# EAGLE board Inverter 3 Phase MC3PHAC (EAGLE 9.5.0)
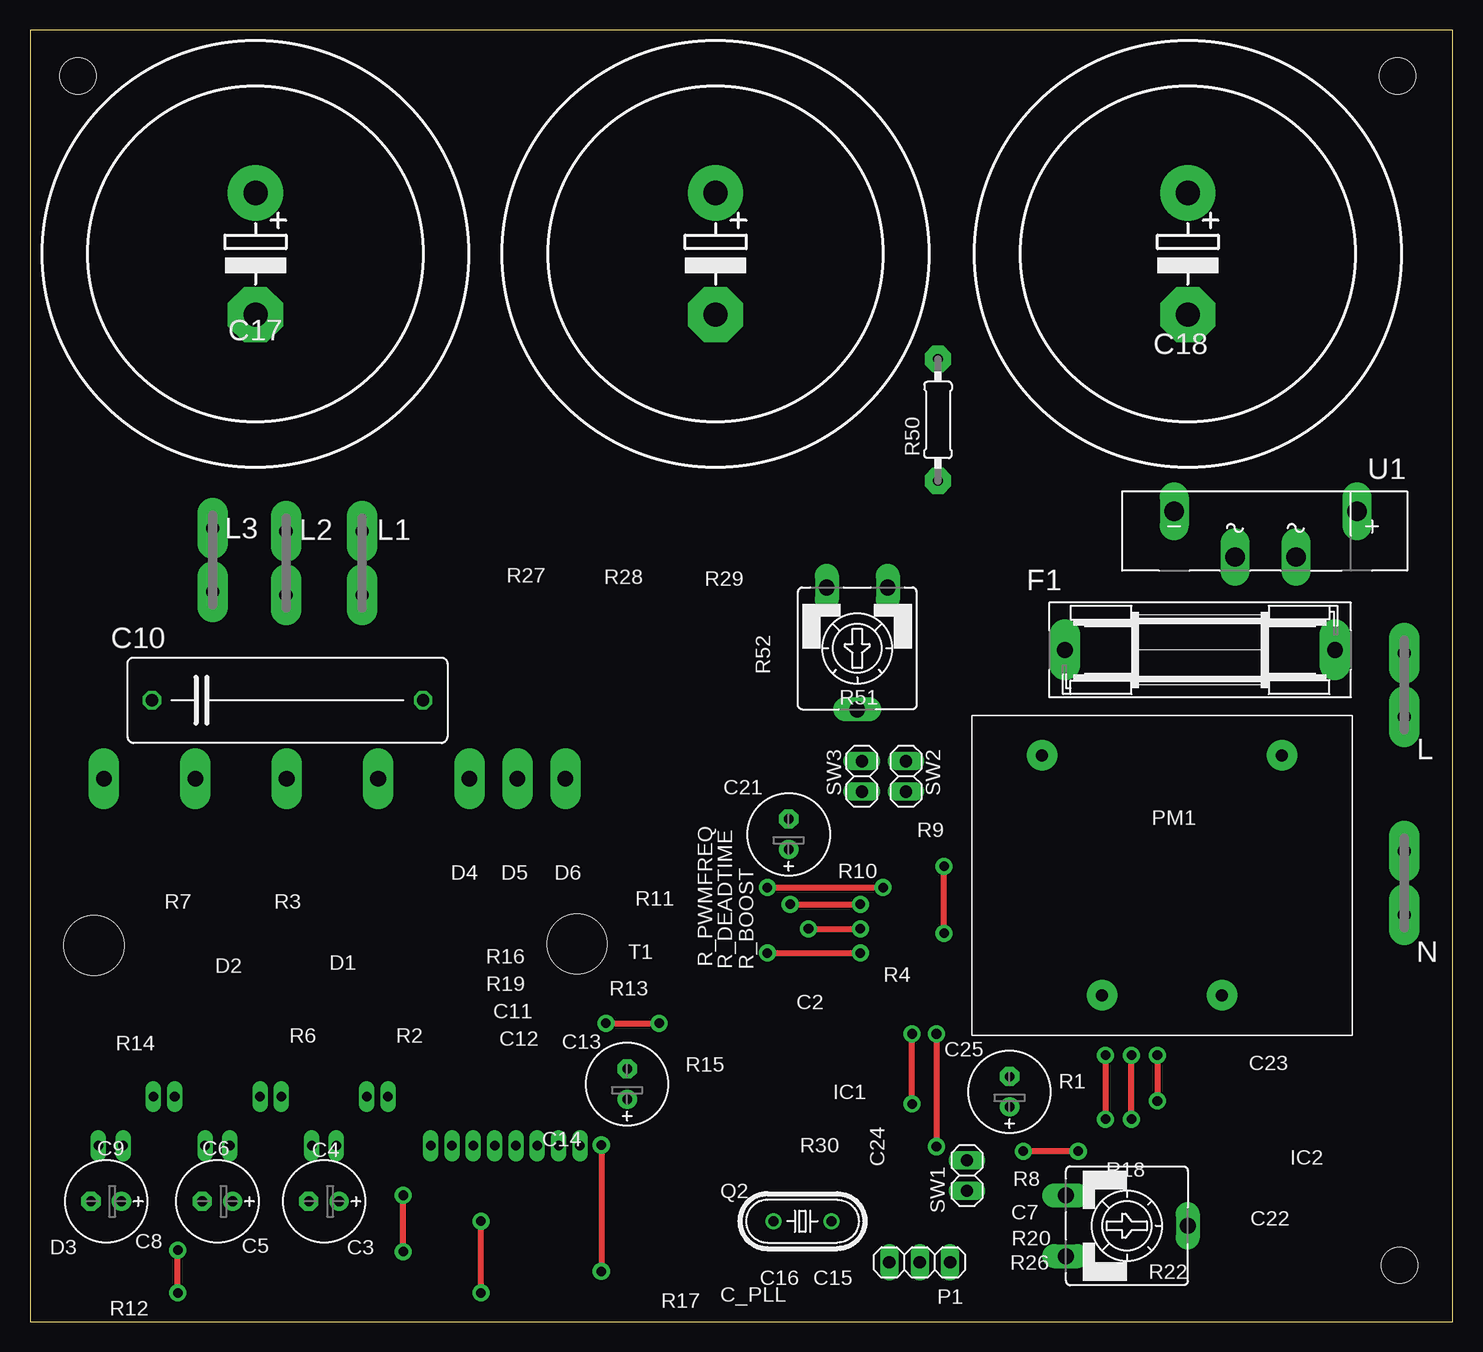
[diagram p0: board, top side]
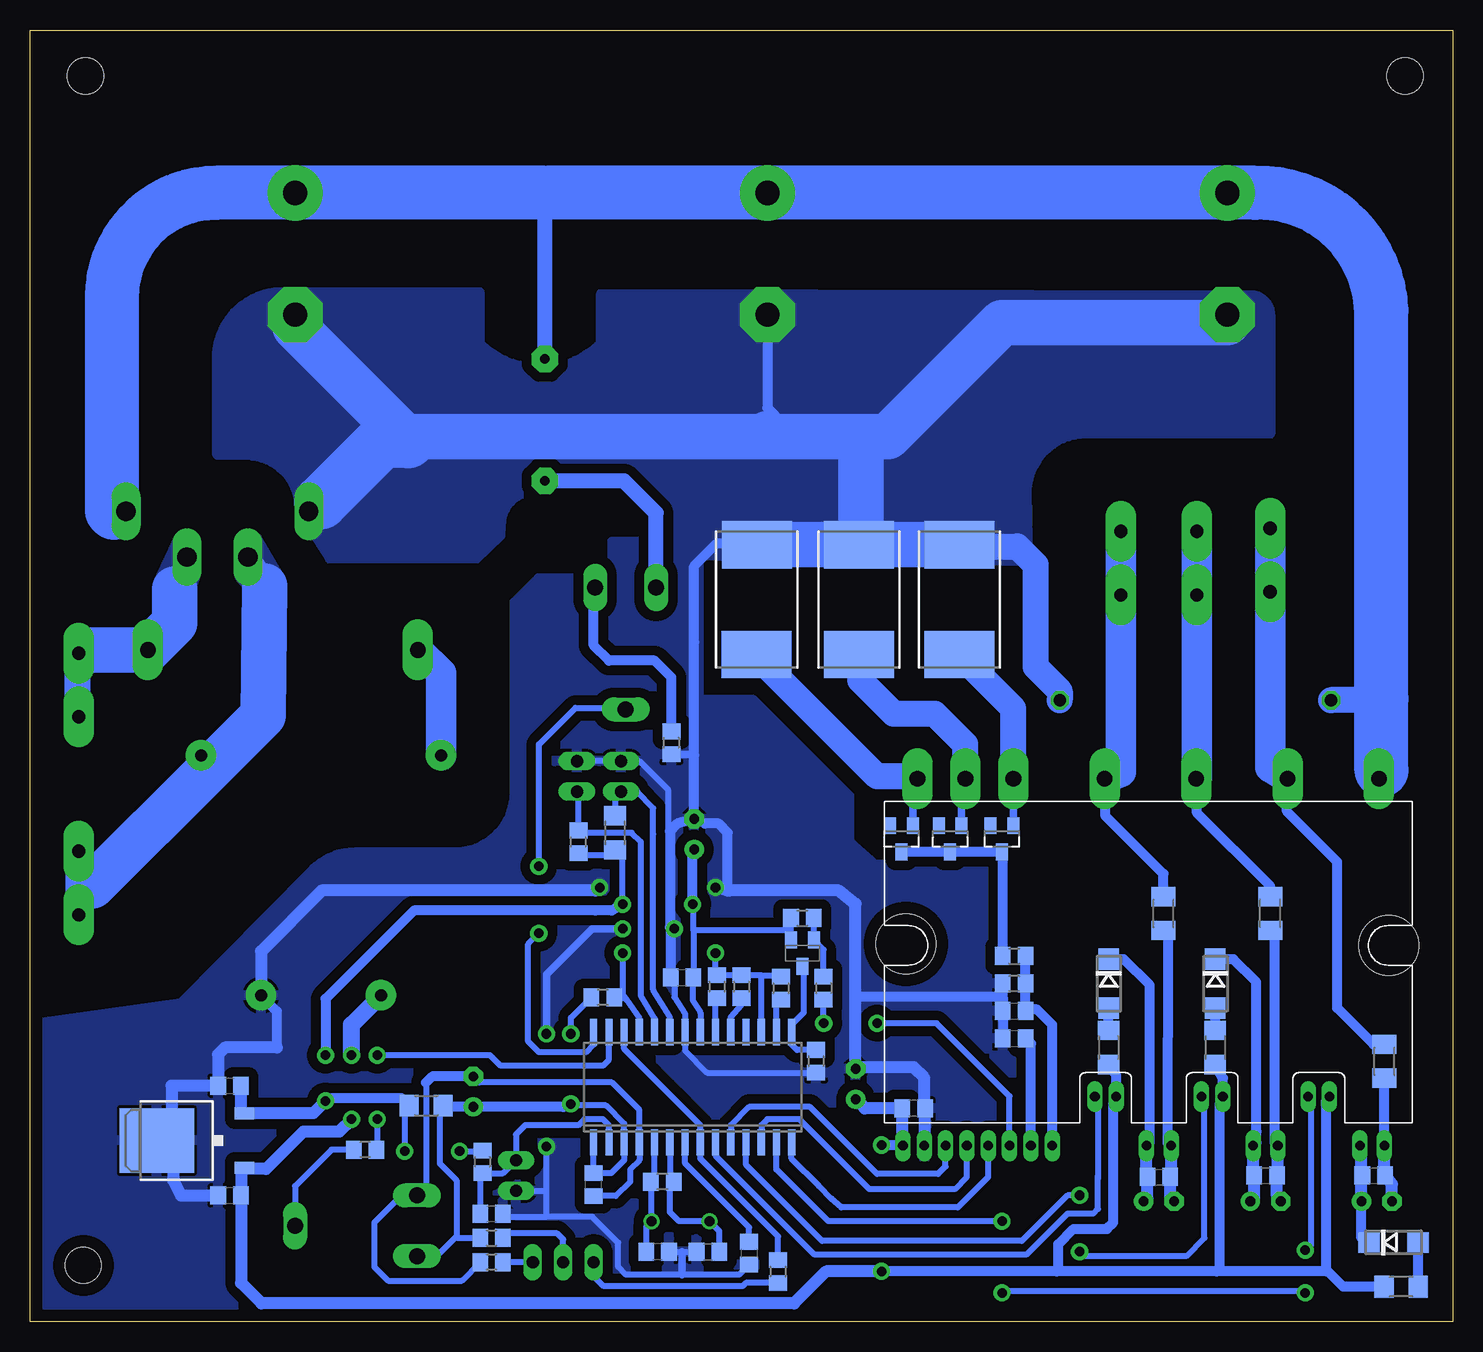
[diagram p1: board, bottom side, seen from below]

Size 118.62 x 107.69 mm. Coordinates in mm from the lower left corner, seen from the top.
Outline: 0,0 118.62,0 118.62,107.69 0,107.69 0,0
Copper layers (1*16): Top 0.035mm / dielectric 1.5mm / Bottom 0.035mm
Design rules "default": minimum track width 10mil, minimum drill 24mil, track to track 8mil, track to pad 8mil, pad to pad 8mil, via to via 8mil, smd to smd 8mil, copper to edge 40mil, drill to drill 8mil, minimum pad ring 10mil, minimum via ring 8mil, stop-mask expansion 4mil, vias tented up to drill 0mil, thermal gap 10mil
Holes 5 mm at 5.33,31.37 45.59,31.5
Holes 3 mm at 114.17,4.7 4,103.86 114,103.86

## Footprints (pad centres in the part's own frame; a part is rotated, then mirrored left to right if it is on the bottom)
C0805 = smd 1.3 x 1.5: 1 -0.95,0; 2 0.95,0
E2,5-7 = drill 0.813 pad 1.6: + -1.27,0 | drill 0.813 pad 1.6 octagon: - 1.27,0
C225-074X268 = drill 1.016 octagon: 1 -11.303,0; 2 11.303,0
EB35D = drill 2.007 pad 4.597: + -5.08,0 | drill 2.007 pad 4.597 octagon: - 5.08,0
DO214AC = smd 1.8 x 1.7: A 2.05,0; C -2.05,0
SOT23 = smd 1 x 1.4: 1 -0.95,-1.1; 2 0.95,-1.1; 3 0,1.1
SH22,5 = drill 1.321 pad 2.54 long: 1 -11.252,0; 2 11.252,0
SO28W = smd 0.6 x 2.2: 1 -8.255,-4.6; 2 -6.985,-4.6; 3 -5.715,-4.6; 4 -4.445,-4.6; 5 -3.175,-4.6; 6 -1.905,-4.6; 7 -0.635,-4.6; 8 0.635,-4.6; 9 1.905,-4.6; 10 3.175,-4.6; 11 4.445,-4.6; 12 5.715,-4.6; 13 6.985,-4.6; 14 8.255,-4.6; 15 8.255,4.6; 16 6.985,4.6; 17 5.715,4.6; 18 4.445,4.6; 19 3.175,4.6; 20 1.905,4.6; 21 0.635,4.6; 22 -0.635,4.6; 23 -1.905,4.6; 24 -3.175,4.6; 25 -4.445,4.6; 26 -5.715,4.6; 27 -6.985,4.6; 28 -8.255,4.6
TO252 = smd 1 x 1.6: 1 -2.28,-4.8; 2 2.28,-4.8 | smd 5.4 x 6.2: 3 0,2.5
F061.060 = drill 1.1 pad 2.54 long: A1 -2.65,0; A2 2.65,0
1X03 = drill 1.016 long: 1 -2.54,0; 2 0,0; 3 2.54,0
MYRRA = drill 1 pad 2.54: 1 -10,10; 5 -10,-10; 7 10,-5; 9 10,5
HC49U-V = drill 0.813: 1 -2.413,0; 2 2.413,0
R1206 = smd 1.6 x 1.803: 1 -1.422,0; 2 1.422,0
M1206 = smd 1.6 x 2: 1 -1.4,0; 2 1.4,0
R0805 = smd 1.3 x 1.5: 1 -0.95,0; 2 0.95,0
CA9V = drill 1.321 long: A -2.54,-5.08; E 2.54,-5.08; S 0,5.08
WSC4527 = smd 3.94 x 5.84: 1 -4.575,0.025; 2 4.575,0
0207/10 = drill 0.813 pad 2.184 octagon: 1 -5.08,0; 2 5.08,0
SPM27-BA = drill 0.8 pad 1.016 long: 1 20.447,15.3; 2 18.669,15.3; 3 16.891,15.3; 4 15.113,15.3; 5 13.335,15.3; 6 11.557,15.3; 7 9.779,15.3; 8 8.001,15.3; 9 4.445,11.2; 10 2.667,11.2; 11 0.136,15.3; 12 -1.914,15.3; 13 -4.445,11.2; 14 -6.223,11.2; 15 -8.754,15.3; 16 -10.804,15.3; 17 -13.335,11.2; 18 -15.113,11.2; 19 -17.644,15.3; 20 -19.694,15.3 | drill 1.3 pad 2.54 long: 21 19.24,-15.3; 22 15.24,-15.3; 23 11.24,-15.3; 24 3.62,-15.3; 25 -4,-15.3; 26 -11.62,-15.3; 27 -19.24,-15.3
1X02 = drill 1.016 long: 1 -1.27,0; 2 1.27,0
SOT23-BEC = smd 1 x 1.4: B -0.95,-1.1; C 0,1.1; E 0.95,-1.1
KBU = drill 1.6 long: + -7.62,-1.27; - 7.62,-1.27; AC1 -2.54,2.54; AC2 2.54,2.54

## Placement (x,y rotation side)
C2  100n  [C0805]  64.26,28.7 0 bottom
C3  100u  [E2,5-7]  24.51,10.03 180 top
C4  100n  [C0805]  24.51,12.06 0 bottom
C5  100u  [E2,5-7]  15.62,10.03 180 top
C6  100n  [C0805]  15.62,12.19 0 bottom
C7  100n  [C0805]  80.14,9.02 0 bottom
C8  100u  [E2,5-7]  6.35,10.03 180 top
C9  100n  [C0805]  6.6,12.19 0 bottom
C10  0.1u  [C225-074X268]  21.46,51.82 0 top
C11  1n  [C0805]  36.58,25.91 0 bottom
C12  100n  [C0805]  36.58,23.62 0 bottom
C13  100u  [E2,5-7]  49.78,19.81 90 top
C14  100n  [C0805]  44.96,17.78 180 bottom
C15  22p  [C0805]  66.29,5.84 180 bottom
C16  22p  [C0805]  62.1,5.84 0 bottom
C17  470u  [EB35D]  18.8,89.03 270 top
C18  470u  [EB35D]  96.52,89.03 270 top
C19  470u  [EB35D]  57.15,89.03 270 top
C21  10u  [E2,5-7]  63.25,40.64 90 top
C22  100n  [C0805]  101.98,10.54 0 bottom
C23  100n  [C0805]  101.98,19.68 0 bottom
C24  100n  [C0805]  71.63,11.43 90 bottom
C25  1u  [E2,5-7]  81.66,19.18 90 top
C_PLL  100n  [C0805]  58.67,5.71 270 bottom
D1  ER1J  [DO214AC]  28.7,28.19 270 bottom
D2  ER1J  [DO214AC]  19.81,28.19 270 bottom
D3  ER1J  [DO214AC]  4.95,6.6 0 bottom
D4  BAR43  [SOT23]  37.59,40.26 180 bottom
D5  BAR43  [SOT23]  41.91,40.26 180 bottom
D6  BAR43  [SOT23]  45.97,40.26 180 bottom
F1  T1A  [SH22,5]  97.54,56.01 180 top
IC1  MC3PHAC  [SO28W]  63.37,19.56 0 bottom
IC2  7805DT  [TO252]  105.54,15.11 90 bottom
L  PIN2F061.060  [F061.060]  114.55,53.09 90 top
L1  PIN2F061.060  [F061.060]  27.69,63.25 270 top
L2  PIN2F061.060  [F061.060]  21.34,63.25 270 top
L3  PIN2F061.060  [F061.060]  15.24,63.5 270 top
N  PIN2F061.060  [F061.060]  114.55,36.58 90 top
P1  5k  [1X03]  74.17,4.95 180 top
PM1  MYRRA 47155  [MYRRA]  94.36,37.21 270 top
Q2  4.0MHz  [HC49U-V]  64.39,8.38 0 top
R1  2R  [R1206]  85.6,18.03 180 bottom
R2  20R  [R1206]  28.7,22.86 90 bottom
R3  5R6  [M1206]  24.13,34.04 270 bottom
R4  6.8k  [R0805]  70.87,27.05 180 bottom
R6  20R  [R1206]  19.81,22.86 90 bottom
R7  5R6  [M1206]  15.24,34.04 270 bottom
R8  10k  [R0805]  80.9,13.34 270 bottom
R9  10k  [R0805]  72.9,40.01 90 bottom
R10  10k  [R1206]  69.85,40.77 90 bottom
R11  6k8  [R0805]  54.23,33.66 0 bottom
R12  20R  [R1206]  4.32,2.92 0 bottom
R13  22k  [R0805]  52.45,27.81 270 bottom
R14  5R6  [M1206]  5.71,21.72 270 bottom
R15  10k  [R0805]  53.09,21.72 270 bottom
R16  1k  [R0805]  36.58,30.48 0 bottom
R17  4.7k  [R0805]  56.26,4.19 270 bottom
R18  4.7k  [R0805]  90.68,14.35 180 bottom
R19  47k  [R0805]  36.58,28.19 180 bottom
R20  2k2  [R0805]  80.14,6.99 0 bottom
R22  4k7  [CA9V]  91.44,8 270 top
R26  150R  [R0805]  80.14,4.95 180 bottom
R27  0R082 5W  [WSC4527]  41.15,60.2 270 bottom
R28  0R082 5W  [WSC4527]  49.53,60.2 270 bottom
R29  0R082 5W  [WSC4527]  58.04,60.2 270 bottom
R30  10M  [R0805]  65.91,11.68 180 bottom
R50  1M  [0207/10]  75.69,75.18 90 top
R51  4k7  [CA9V]  68.96,56.13 180 top
R52  10k  [R0805]  65.15,48.26 270 bottom
R_BOOST  2k2  [R0805]  61.34,27.94 270 bottom
R_DEADTIME  1k8  [R0805]  59.31,27.94 270 bottom
R_PWMFREQ  3k9  [R0805]  56.01,27.81 270 bottom
SPM1  FSBS10CH60  [SPM27-BA]  25.4,29.97 180 bottom
SW1  RESET  [1X02]  78.11,12.19 90 top
SW2  START  [1X02]  73.03,45.47 270 top
SW3  FOR/REW  [1X02]  69.34,45.47 270 top
T1  BC858  [SOT23-BEC]  54.23,30.73 180 bottom
U1  KBU8G  [KBU]  103,66.29 180 top

## Library data of the parts
C2-C19 C21-C25 C_PLL R1-R4 R6-R20 R26-R30 R50 R52 R_BOOST R_DEADTIME R_PWMFREQ = rcl
D1-D6 = diode
F1 = fuse
IC1 P1 PM1 SPM1 SW1-SW3 U1 = Menic
IC2 = linear
L L1-L3 N = con-faston
Q2 = crystal
R22 R51 = pot
T1 = transistor

## Nets
+5V: C2.2 C21.+ C23.2 IC1.21 IC2.2 R1.2 R8.1 R9.1 R10.1 R11.1 T1.E
+15V: C13.+ C14.2 C22.2 IC2.1 PM1.7 R2.1 R6.1 R12.1 SPM1.1 SPM1.10 SPM1.14 SPM1.18
DC_BUS: C10.1 C17.+ C18.+ C19.+ R50.2 SPM1.27 U1.+
GND: C2.1 C7.2 C10.2 C11.1 C12.1 C13.- C14.1 C15.1 C16.1 C17.- C18.- C19.- C21.- C22.1 C23.1 C_PLL.2 IC1.22 IC2.3 PM1.9 R15.2 R19.2 R27.1 R28.1 R29.1 R52.2 SPM1.2 SW1.1 SW2.1 SW3.1 U1.-
GND1: C24.1 C25.- IC1.4 R22.A R26.2
N$1: C_PLL.1 IC1.7
N$2: R18.2 R22.S
N$3: IC1.16 R_PWMFREQ.2
N$4: IC1.19 R_DEADTIME.2
N$5: IC1.20 R_BOOST.2
N$6: IC1.17 IC1.25 R4.1 R_BOOST.1 R_DEADTIME.1 R_PWMFREQ.1
N$7: IC1.8 IC1.26 R17.1
N$8: P1.3 R17.2
N$9: C15.2 IC1.5 Q2.2 R30.2
N$10: P1.2 R20.2
N$12: IC1.27 R18.1
N$13: IC1.24 R9.2 SW2.2
N$14: IC1.23 R10.2 SW3.2
N$15: C16.2 IC1.6 Q2.1 R30.1
N$16: C7.1 IC1.2 R8.2 SW1.2
N$17: N.A1 PM1.1 U1.AC2
N$19: C5.- C6.2 R7.2 SPM1.16
N$20: F1.2 PM1.5
N$25: F1.1 L.A1 U1.AC1
N$27: R51.A R52.1
N$46: C3.+ C4.1 D1.C SPM1.11
N$47: C3.- C4.2 R3.2 SPM1.12
N$48: D1.A R2.2
N$50: C11.2 R16.2 R19.1 SPM1.8
N$51: IC1.15 R15.1 T1.C
N$52: C12.2 SPM1.7
N$53: C5.+ C6.1 D2.C SPM1.15
N$55: D2.A R6.2
N$56: C8.+ C9.1 D3.C SPM1.19
N$57: D3.A R12.2
N$59: C8.- C9.2 R14.2 SPM1.20
N$63: D4.1 R27.2 SPM1.23
N$64: D5.1 R28.2 SPM1.22
N$65: D6.1 R29.2 SPM1.21
N$69: D4.3 D5.3 D6.3 R16.1
N$72: R11.2 R13.1 T1.B
N$77: P1.1 R26.1
N$79: IC1.28 R51.S
PWM-U-BOT: IC1.10 SPM1.3
PWM-U-TOP: IC1.9 SPM1.9
PWM-V-BOT: IC1.12 SPM1.4
PWM-V-TOP: IC1.11 SPM1.13
PWM-W-BOT: IC1.14 SPM1.5
PWM-W-TOP: IC1.13 SPM1.17
R_BRAKE: IC1.18
S$1: R50.1 R51.E
U: L1.A1 R3.1 SPM1.24
V: L2.A1 R7.1 SPM1.25
V_FO: R13.2 SPM1.6
VDD: C24.2 C25.+ IC1.1 IC1.3 R1.1 R4.2 R20.1 R22.E
W: L3.A1 R14.1 SPM1.26

## Tracks (layer width: path | path; a pad name or v marks a point on that pad's centre or on a via)
+5V  (via drill 0.8 pad 1.42)
  Top 0.5: v87.38,14.22 v82.8,14.22 | v63.37,34.8 v69.22,34.8 | v93.98,22.23 v93.98,18.41
  Bottom 0.5: T1.E 55.18,33.02 | 55.18,33.02 R11.1 | R9.1 72.7,38.86 70.33,38.86 R10.1 69.22,38.71 v69.22,34.8 | IC1.21 62.74,25.78 63.37,26.8 63.37,28.64 C2.2 63.31,32.64 | 63.31,32.64 63.31,34.23 v63.37,34.8 | 89.53,18.66 89.66,18.54 | 55.18,33.02 55.24,32.96 55.56,32.64 63.31,32.64 | 81.09,14.1 R8.1 80.96,14.22 v82.8,14.22 | R1.2 87.12,17.93 87.38,17.93 v87.38,14.22
  Bottom 0.813: R1.2 87.65,18.66 87.88,18.66 89.53,18.66 90.19,18.66 93.73,18.66 v93.98,18.41 | v69.22,34.8 70.1,34.29 71.5,34.29 86.61,34.29 93.98,26.92 v93.98,22.23 | v63.37,34.8 63.37,38.86 C21.+
  Bottom 1.016: v93.98,18.41 95,17.39 95.25,17.39 IC2.2 101.03,17.69 C23.2
+15V  (via drill 0.8 pad 1.42)
  Top 0.5: v47.62,14.73 v47.62,4.19 | v91.82,16.89 v91.82,22.23
  Bottom 0.813: SPM1.14 19.18,20.3 R6.1 | R2.1 28.07,20.55 SPM1.10 28.07,18.41 28.32,18.16 28.32,8.26 28.83,7.75 31.62,7.75 32.89,6.48 32.89,4.32 33.02,4.19 | 10.54,4.19 19.68,4.19 | SPM1.14 19.3,18.77 | 19.68,4.19 33.02,4.19 | v47.62,14.73 45.91,14.73 SPM1.1 | R12.1 9.14,2.92 10.41,4.19 10.54,4.19 | 10.54,4.19 10.54,18.52 SPM1.18 | SPM1.14 19.18,18.41 19.43,18.16 19.43,4.45 19.68,4.19 | 33.02,4.19 v47.62,4.19
  Bottom 1.016: C13.+ 49.02,17.78 C14.2 45.91,14.73 SPM1.1 | v47.62,4.19 52.26,4.19 54.93,1.52 99.31,1.52 101.03,3.24 C22.2 101.03,12.54 IC2.1 100.65,12.75 98.93,12.75 95.81,15.88 92.84,15.88 v91.82,16.89
  Bottom 1.422: v91.82,22.23 91.82,24.75 PM1.7
DC_BUS
  Bottom 0.813: 76.07,93.6 76.07,93.73 75.69,94.11
  Bottom 1.016: 75.56,94.11 76.07,93.6
  Bottom 1.27: R50.2 75.69,93.98 75.56,94.11
  Bottom 2.184: 5.97,45.97 5.97,45.46 SPM1.27 | C10.1 6.1,51.82 5.97,51.94 | 111.63,67.44 110.74,67.44 U1.+
  Bottom 3.81: 75.56,94.11 75.69,94.11
  Bottom 4.5: 75.56,94.11 C19.+ C17.+ 16.51,94.11 arc90 5.97,84.33 5.97,51.94 5.97,45.97 | 75.69,94.11 C18.+ 103.12,94.11 arc-90 111.79,85.44 111.79,67.59 111.63,67.44
GND  (via drill 0.8 pad 1.42)
  Top 0.5: v64.9,32.77 v69.22,32.77 | v75.56,24 v75.56,14.61 | v61.47,36.2 v71.12,36.2
  Bottom 0.5: C16.1 64.26,5.84 C15.1 65.72,5.46 | 58.74,4.7 C_PLL.2 59.5,3.94 | C2.1 64.9,28.64 64.9,27.05 64.01,25.65 IC1.22 64.01,22.61 62.17,20.77 R15.2 | SW2.1 SW3.1 67.82,46.74 65.41,44.32 65.41,40.89 65.28,40.89 | 63.25,56.64 63.37,56.77
  Bottom 0.508: 59.5,3.94 64.26,3.94 68.96,3.94 69.6,4.57 69.6,6.6 71.75,8.76 75.56,8.76 | 75.56,8.76 75.56,10.92 | 75.56,10.92 v75.56,14.61 | C7.2 78.93,8.76 75.56,8.76 | SW1.1 75.56,10.92
  Bottom 0.61: 65.21,32.63 65.02,32.63 v64.9,32.77 | v69.22,32.77 71.75,32.77 75.56,28.96 v75.56,24 | 64.26,5.84 64.26,3.94 | R52.2 63.31,47.31 63.25,47.24
  Bottom 0.813: C14.1 44.07,18.03 | 65.21,32.63 C2.1 | 60.45,36.07 60.45,35.94 | 60.33,35.94 60.45,36.07 | C21.- 62.36,41.53 61.21,41.53 60.45,40.77 60.45,36.07 | C21.- 64.64,41.53 65.28,40.89 65.28,32.89 v64.9,32.77 | C21.- 63.25,47.24 63.25,56.64 63.25,62.99 61.34,64.9 58.14,64.9 R29.1 | 98.04,22.86 98.04,25.89 PM1.9 | 49.78,27.09 49.44,27.14 37.61,27.14 37.53,27.05 | 37.53,27.05 C11.1 C12.1 | 37.53,27.05 R19.2 | C19.- 57.15,76.2 55.88,74.93 57.02,73.79 57.4,73.79
  Bottom 1.016: 60.45,35.94 v61.47,36.2 | v71.12,36.2 71.5,35.94 94.31,35.94 99.36,30.89 PM1.9 100.17,27.21 | 106.81,16.34 106.81,19.68 C23.1 102.93,22.29 102.36,22.86 98.04,22.86 | 106.81,16.34 106.79,16.36 106.55,16.13 | 106.81,16.34 IC2.3 106.68,13.76 106.68,11.81 106.05,10.54 C22.1 | 60.33,35.94 51.18,35.94 49.78,34.85 49.78,27.09 C13.- 49.66,21.21 44.96,21.21 44.07,20.32 44.07,17.84 C14.1 44.01,14.73 SPM1.2
  Bottom 2.184: C10.2 32.77,52.58 34.8,54.61 34.8,63.12 36.32,64.64 40.99,64.64 R27.1 | 94.36,68.33 94.61,68.33 U1.-
  Bottom 3.81: C17.- 18.8,83.31 37.59,83.31 47.12,73.79 49.15,73.79 | 49.15,73.79 57.4,73.79 | 57.4,73.79 57.15,74.04 | 49.36,64.77 R28.1 R29.1 | 49.36,64.77 R27.1 | 49.36,64.77 49.36,73.58 49.15,73.79 | 57.4,73.79 86.87,73.79 87.12,73.53 | C18.- 96.52,82.93 87.12,73.53 | 87.12,73.53 87.25,73.53
  Bottom 4.5: 87.25,73.53 87.12,73.41 89.28,73.41 94.36,68.33
  pour Bottom (isolate 0.813, no thermals): 15.24,74.04 30.6,74.04 arc-90 35.56,69.04 35.43,63.37 70.74,64.01 70.74,66.17 arc-90 73.28,69.22 76.58,69.22 arc-90 79.38,66.42 79.42,65.51 81.42,63.6 93.62,63.62 96.1,67.55 arc-91 100.51,72.23 103,72.26 103,80.77 arc90 97.16,85.85 81.15,85.85 81.15,81.58 arc-90 70.99,81.58 70.99,85.72 16.89,85.6 arc90 15.24,83.95
  pour Bottom (isolate 0.813): 48.13,38.1 50.29,40.01 50.29,43.81 58.29,51.82 62.87,51.82 62.87,64.9 70.1,65.02 70.1,61.98 76.23,61.98 78.23,59.98 78.23,44.12 arc90 83.23,39.12 91.53,39.12 arc-45 95.06,37.65 106.05,26.54 117.98,24.89 118.11,0.51 33.14,0.63 33.53,38.1
GND1
  Bottom 0.5: IC1.4 67.82,17.65 70.1,19.94 81.15,19.94 C25.- | 85.6,19.94 85.6,10.54 R22.A 87.63,10.54 89.92,8.26 89.92,4.57 88.77,3.43 82.61,3.43 R26.2
  Bottom 0.508: IC1.4 67.82,13.46 68.58,12.7 68.58,11.68 69.78,10.48 C24.1
  Bottom 0.813: 85.6,19.94 85.09,20.45 C25.-
N$1
  Bottom 0.5: IC1.7 64.01,13.21 58.67,7.87 C_PLL.1
N$2
  Bottom 0.5: R18.2 93.47,14.35 96.52,11.3 R22.S
N$3
  Bottom 0.5: IC1.16 56.39,26.48 R_PWMFREQ.2
N$4
  Bottom 0.5: IC1.19 60.2,25.4 59.31,26.42 R_DEADTIME.2
N$5
  Bottom 0.5: IC1.20 61.47,26.86 R_BOOST.2
N$6  (via drill 0.8 pad 1.42)
  Top 0.5: v61.47,30.73 v69.22,30.73
  Bottom 0.5: IC1.17 57.66,28.89 | 57.66,28.89 R_DEADTIME.1 R_BOOST.1 61.47,29.02 v61.47,30.73 | R_PWMFREQ.1 56.01,28.89 57.66,28.89 | v69.22,30.73 69.22,29.52 69.22,27.3 68.88,26.81 | IC1.25 67.82,25.27 68.88,26.81 | R4.1 68.99,26.92 68.88,26.81
N$7
  Bottom 0.5: IC1.26 69.09,22.73 62.74,16.38 IC1.8 62.74,13.59 56.26,7.11 R17.1
N$8
  Bottom 0.5: R17.2 56.67,2.92 | 71.63,3.81 P1.3
  Bottom 0.508: R17.2 58.94,3.24 59.21,2.97 70.79,2.97 71.63,3.81
N$9
  Bottom 0.5: C15.2 67.24,7.94 Q2.2
  Bottom 0.508: IC1.5 66.55,12 R30.2 66.8,11.62 Q2.2
N$10
  Bottom 0.5: P1.2 74.17,6.86 74.68,7.37 78.81,7.37 R20.2
N$12  (via drill 0.8 pad 1.42)
  Top 0.5: v89.66,22.23 v89.66,16.89
  Bottom 0.5: IC1.27 70.36,21.84 70.87,21.34 79.38,21.34 80.26,22.23 v89.66,22.23 | v89.66,16.89 89.66,14.42 R18.1
N$13
  Bottom 0.5: IC1.24 66.55,25.27 67.69,27.18 67.69,30.23 67.69,38.86 67.69,40.01 68.45,40.77 72.71,40.77 R9.2 | R9.2 72.58,40.64 | R9.2 72.9,44.07 SW2.2
N$14
  Bottom 0.5: IC1.23 65.28,25.4 66.67,27.69 66.67,40.64 66.67,42.8 68.07,44.2 | R10.2 69.85,43.69 SW3.2
  Bottom 0.61: 68.07,44.2 SW3.2
N$15
  Bottom 0.5: C16.2 61.15,7.56 Q2.1
  Bottom 0.508: IC1.6 65.28,12 | 65.28,12 R30.1 | Q2.1 64.52,8.38 65.28,9.14 65.28,12
N$16
  Bottom 0.5: IC1.2 70.36,16.38 70.87,16.89 72.39,16.89 72.9,16.38 76.07,16.38 | C7.1 81.09,12.2 R8.2 80.71,12.19
  Bottom 0.508: 76.07,16.38 77.34,16.38 78.11,15.62 SW1.2 79.18,12.38 R8.2
N$17
  Bottom 2.184: N.A1 114.55,38.48 | 114.55,38.48 114.55,39.12 | U1.AC2 100.46,63.63 99.06,61.34 | 113.41,36.32 113.41,37.34 114.55,38.48 | PM1.1 104.36,46.83 103.63,46.1
  Bottom 3.81: 113.41,36.32 103.63,46.1 99.44,50.29 99.19,50.55 99.06,61.34
  pour Bottom (isolate 1.016, no thermals): 97.54,61.21 97.54,62.01 99.54,65.41 100.58,65.66 101.35,64.77 101.35,62.1 100.71,61.34 98.17,61.09
N$19
  Bottom 0.813: SPM1.16 14.86,14.94 14.86,15.88 14.85,31.86 R7.2 | C6.2 14.6,12.27
  Bottom 1.016: 14.6,12.27 SPM1.16 | C6.2 14.67,10.48 C5.-
N$20
  Bottom 2.54: PM1.5 84.36,54.08 F1.2
N$25
  Bottom 2.184: 106.55,61.09 105.54,62.87 | 113.54,56.01 114.3,56.01 114.68,55.63 114.68,50.56 L.A1
  Bottom 3.81: 106.55,61.09 106.55,58.24 F1.1 113.54,56.01
  pour Bottom (isolate 1.016, no thermals): 108.08,61.72 106.3,65.53 104.9,65.02 104.65,62.36 104.9,61.47
N$27
  Bottom 0.813: R52.1 65.15,53.72 66.55,55.12 70.36,55.12 71.63,56.39 71.63,61.09 R51.A
N$46
  Bottom 0.813: SPM1.11 25.27,14.94 25.27,15.37 25.28,28.08 27.43,30.23 28.94,30.23 D1.C
  Bottom 1.016: C3.+ 25.46,10.23 C4.1 25.54,12.14 SPM1.11
N$47
  Bottom 0.813: SPM1.12 23.75,14.81 23.75,15.37 23.74,31.99 R3.2
  Bottom 1.016: C3.- 23.56,10.48 C4.2 23.49,12.14 SPM1.12
N$48
  Bottom 0.813: R2.2 D1.A
N$50
  Bottom 0.813: R16.2 R19.1 C11.2 35.5,26.04 34.67,26.04 33.4,24.77 SPM1.8
N$51
  Bottom 0.5: T1.C 54.1,29.51 54.1,25.78 55.12,24.77 IC1.15 55.12,23.11 54.67,22.67 R15.1
N$52
  Bottom 0.813: SPM1.7 35.18,23.18 C12.2
N$53
  Bottom 0.813: SPM1.15 16.38,14.94 16.38,15.88 16.39,28.33 18.29,30.23 20.3,30.23 D2.C | C6.1 16.65,12.27
  Bottom 1.016: C6.1 16.57,10.23 C5.+ | 16.65,12.27 SPM1.15
N$55
  Bottom 0.813: R6.2 D2.A
N$56
  Bottom 0.813: C8.+ 7.62,6.97 D3.C | C9.1 7.76,12.52
  Bottom 1.016: C8.+ 7.62,12.13 C9.1 7.62,12.26 7.62,14.61 7.69,14.67 SPM1.19
N$57
  Bottom 0.813: D3.A 2.9,2.94 arc-45 R12.2
N$59
  Bottom 0.813: SPM1.20 5.71,20.31 R14.2
  Bottom 1.016: SPM1.20 5.71,12.27 C9.2 5.08,11.49 C8.-
N$63
  Bottom 0.61: D4.1 SPM1.23
  Bottom 0.813: SPM1.23
  Bottom 2.184: SPM1.23 36.64,51.12 R27.2
N$64
  Bottom 0.5: 40.96,44.95 SPM1.22
  Bottom 0.61: D5.1 40.96,44.95
  Bottom 2.184: SPM1.22 40.64,48.13 43.18,50.67 46.61,50.67 49.4,53.47 49.4,55.5 R28.2
N$65
  Bottom 0.5: 45.02,44.89 SPM1.21
  Bottom 0.61: D6.1 45.02,44.89
  Bottom 2.184: R29.2 58.04,55.5 48.01,45.47 44.83,45.47 SPM1.21
N$69
  Bottom 0.813: D4.3 37.59,39.24 | D6.3 D5.3 D4.3 | R16.1 37.53,39.09 D4.3
N$72
  Bottom 0.5: R11.2 T1.B 52.45,31.01 R13.1
N$77
  Bottom 0.5: P1.1 R26.1
N$79  (via drill 0.8 pad 1.42)
  Top 0.5: v76.2,32.38 v76.2,37.97
  Bottom 0.5: 71.63,24.13 IC1.28 71.63,23.11 72.26,22.48 76.2,22.48 77.09,23.37 77.09,31.5 v76.2,32.38 | R51.S 69.09,51.18 73.15,51.18 76.2,48.13 v76.2,37.97
PWM-U-BOT
  Bottom 0.5: SPM1.3 42.29,12.95 42.93,12.32 48.01,12.32 | IC1.10 60.2,16.38 58.67,17.91 53.59,17.91
  Bottom 0.508: 53.59,17.91 48.01,12.32
PWM-U-TOP
  Bottom 0.5: IC1.9 61.47,13.84 53.21,5.59 35.56,5.59 32.13,9.02 29.97,9.02 29.59,9.4 29.59,11.94 29.59,12.19
  Bottom 0.508: SPM1.9 29.59,18.77 29.59,11.94
PWM-V-BOT
  Bottom 0.5: SPM1.4 40.51,12.06 41.53,11.05 48.64,11.05 54.48,16.89 57.15,16.89 57.66,16.38 IC1.12
PWM-V-TOP  (via drill 0.8 pad 1.42)
  Top 0.5: v31.11,5.84 v31.11,10.54
  Bottom 0.5: v31.11,5.84 30.73,5.46 22.23,5.46 20.7,6.99 20.7,17.78 20.95,18.03 SPM1.13 | IC1.11 58.93,13.08 52.58,6.73 35.94,6.73 32.13,10.54 v31.11,10.54
PWM-W-BOT
  Bottom 0.5: SPM1.5 38.73,12.06 41.27,9.53 50.98,9.53 51.78,10.26 | 52.86,11.33 55.12,13.59 IC1.14
  Bottom 0.508: 52.86,11.33 51.78,10.26
PWM-W-TOP  (via drill 0.8 pad 1.42)
  Top 0.5: v12.32,2.41 v12.32,5.97 | v37.59,2.41 v37.59,8.38
  Bottom 0.5: SPM1.17 11.81,18.64 11.81,6.35 v12.32,5.97 | IC1.13 56.39,12.7 52.07,8.38 v37.59,8.38 | v12.32,2.41 12.45,2.41 12.7,2.54 37.34,2.54 v37.59,2.41
S$1
  Bottom 1.27: R51.E 66.42,67.44 69.09,70.1 R50.1
U
  Bottom 0.813: R3.1 24.13,37.34 28.96,42.16 28.96,45.21 SPM1.24
  Bottom 2.54: L1.A1 27.69,45.84 SPM1.24
V
  Bottom 0.813: R7.1 15.24,36.32 21.34,42.42 21.34,45.21 SPM1.25
  Bottom 2.54: L2.A1 21.34,45.34 SPM1.25
V_FO  (via drill 0.8 pad 1.42)
  Top 0.5: v48.01,24.89 v52.45,24.89
  Bottom 0.5: SPM1.6 36.96,18.8 43.05,24.89 v48.01,24.89 | v52.45,24.89 R13.2
VDD  (via drill 0.8 pad 1.42)
  Top 0.5: v73.53,18.16 v73.53,24
  Bottom 0.5: v73.53,24 73.53,25.33 R4.2 | 74.04,18.03 v73.53,18.16 | 74.04,18.03 74.17,17.91 | 74.04,18.03 70.61,18.03 69.09,16.51 IC1.3 | 83.06,7.11 83.06,11.81 84.45,13.21 84.45,17.65 84.18,17.93 R1.1 | 83.06,7.11 84.45,5.71 86.11,5.71 R22.E | 83.06,7.11 82.93,6.99 R20.1
  Bottom 0.508: IC1.3 69.09,13.46 70.17,12.38 C24.2 IC1.1
  Bottom 0.813: 74.17,17.91 C25.+ 84.05,17.91 R1.1
W
  Bottom 0.813: R14.1 6.61,23.12 9.65,26.16 9.65,38.35 13.84,42.55 13.84,45.21 SPM1.26
  Bottom 2.54: L3.A1 15.24,46.22 SPM1.26